# Altium PCB 尺寸.PcbDoc
Units mm, origin at the board's own origin, x right, y up, seen from the top; angles counter-clockwise.
Board outline 190 x 34 mm, 2 copper layers (Top Layer, Bottom Layer); 17 components, 0 nets, 39 pads, 0 vias.
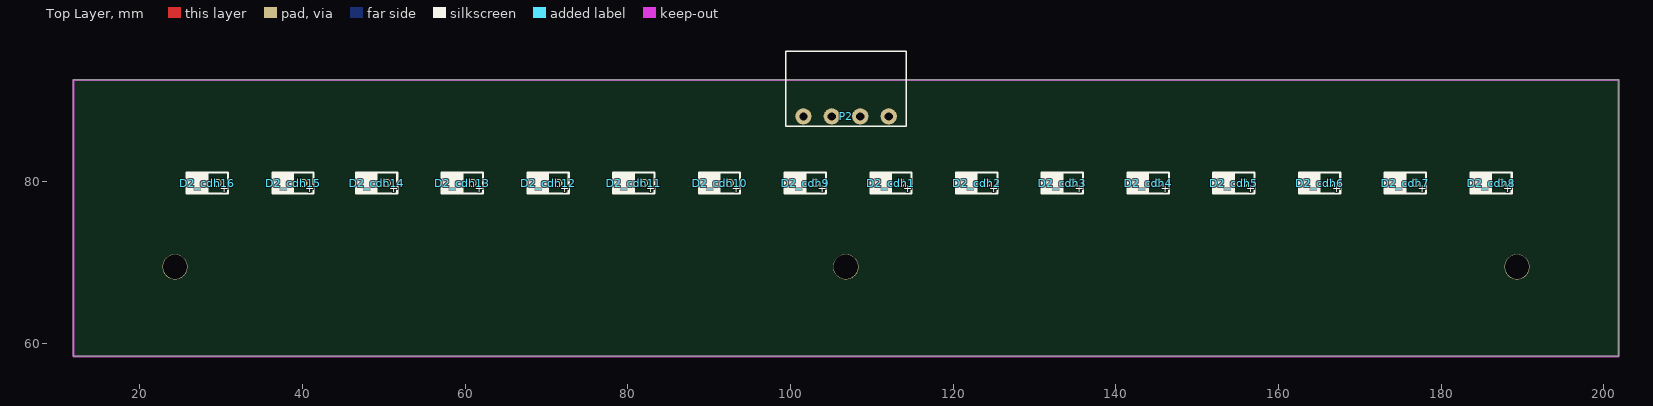
[diagram p0: Top Layer view]
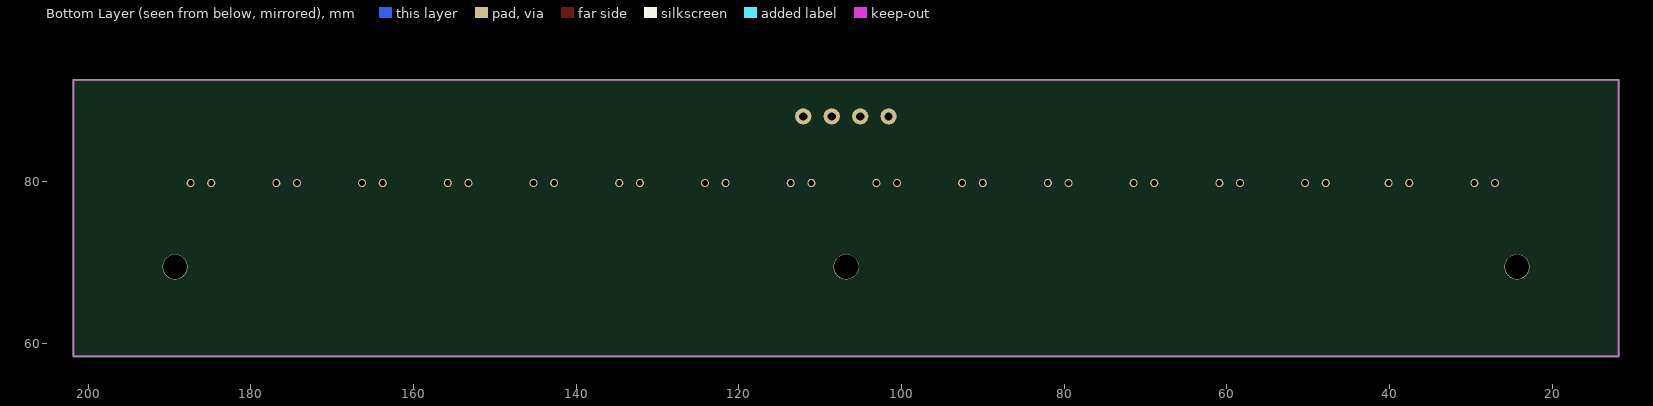
[diagram p1: Bottom Layer view, seen from below]

## Layer stack, top to bottom
Top Layer: signal copper 0.0356
Dielectric: dielectric 0.32, FR-4, Dk 4.8
Bottom Layer: signal copper 0.0356

## Board outline
11.822,58.471 11.822,92.471 201.822,92.471 201.822,58.471

## Design rules (kind name [scope] priority, off if disabled: settings)
Clearance [All] p1: gap=0.254
PolygonConnect [All] p1: connectstyle=Relief reliefconductorwidth=0.254 reliefentries=4 polygonreliefangle="90 Angle"
RoutingVias [All] p1: holewidth=0.711 width=1.27 viastyle="Through Hole" minholewidth=0.711 minwidth=1.27 maxholewidth=0.711 maxwidth=1.27
SilkscreenOverComponentPads [All] p1: minsilkscreentomaskgap=0.254
SolderMaskExpansion [All] p1: expansion=0.102
Width [All] p1: maxlimit=0.254 minlimit=0.254 preferedwidth=0.254
27 further rules are at their usual default settings.

## Components (designator, comment, footprint, x,y, rotation, side; value= is the part's Value field where it differs from the comment)
D2_cdh1 "LED0" LED1 111.081,79.781 r0 top (schematic designator D2)
D2_cdh2 "LED0" LED1 121.621,79.781 r0 top (schematic designator D2)
D2_cdh3 "LED0" LED1 132.161,79.781 r0 top (schematic designator D2)
D2_cdh4 "LED0" LED1 142.701,79.781 r0 top (schematic designator D2)
D2_cdh5 "LED0" LED1 153.241,79.781 r0 top (schematic designator D2)
D2_cdh6 "LED0" LED1 163.781,79.781 r0 top (schematic designator D2)
D2_cdh7 "LED0" LED1 174.321,79.781 r0 top (schematic designator D2)
D2_cdh8 "LED0" LED1 184.861,79.781 r0 top (schematic designator D2)
D2_cdh9 "LED0" LED1 100.541,79.781 r0 top (schematic designator D2)
D2_cdh10 "LED0" LED1 90.001,79.781 r0 top (schematic designator D2)
D2_cdh11 "LED0" LED1 79.461,79.781 r0 top (schematic designator D2)
D2_cdh12 "LED0" LED1 68.921,79.781 r0 top (schematic designator D2)
D2_cdh13 "LED0" LED1 58.381,79.781 r0 top (schematic designator D2)
D2_cdh14 "LED0" LED1 47.841,79.781 r0 top (schematic designator D2)
D2_cdh15 "LED0" LED1 37.568,79.781 r0 top (schematic designator D2)
D2_cdh16 "LED0" LED1 27.028,79.781 r0 top (schematic designator D2)
P2 "Header 4" DZ-4-3.5 112.075,87.975 r180 top

## Footprints (in the part's own frame and the unit in brackets; to place one, negate y for a bottom-side part, rotate by r counter-clockwise, add the part's x,y. Pads: shape width x height; smd on the part's side, far side on the other; paste and mask are expansions set on the pad)
DZ-4-3.5 [mm]
  round 2 hole 1: 1(0,0) 2(3.5,0) 3(7,0) 4(10.5,0)
  silkscreen extent -2.15,-8 12.65,1.2
LED1 [mm]
  round 1 hole 0.7: 1(2.54,0) 2(0,0)
  silkscreen extent -1.27,-1.27 3.81,1.27

## Part data
D2_cdh1 D2_cdh2 D2_cdh3 D2_cdh4 D2_cdh5 D2_cdh6 D2_cdh7 D2_cdh8 D2_cdh9 D2_cdh10 D2_cdh11 D2_cdh12 D2_cdh13 D2_cdh14 D2_cdh15 D2_cdh16: "Typical INFRARE"

## Free pads (board coordinates)
  round 3.1 hole 3: 3(24.318,69.471) 3(106.807,69.469) 3(189.318,69.471)

## Nets (pads, with @x,y where several pads share a name; then routed paths per layer and width w, separated by ;. In a path a pad name is that pad's centre, name@x,y a point inside that pad or via, vN(x,y) a via of type N, cw(c..) or ccw(c..) an arc to the next point about the centre after c; other vN are vias at no path point)
pads on no net: D2_cdh1.1 D2_cdh1.2 D2_cdh2.1 D2_cdh2.2 D2_cdh3.1 D2_cdh3.2 D2_cdh4.1 D2_cdh4.2 D2_cdh5.1 D2_cdh5.2 D2_cdh6.1 D2_cdh6.2 D2_cdh7.1 D2_cdh7.2 D2_cdh8.1 D2_cdh8.2 D2_cdh9.1 D2_cdh9.2 D2_cdh10.1 D2_cdh10.2 D2_cdh11.1 D2_cdh11.2 D2_cdh12.1 D2_cdh12.2 D2_cdh13.1 D2_cdh13.2 D2_cdh14.1 D2_cdh14.2 D2_cdh15.1 D2_cdh15.2 D2_cdh16.1 D2_cdh16.2 P2.1 P2.2 P2.3 P2.4

## Keep-outs
Keep-Out Layer:
  lines w0.254: 11.822,58.471 11.822,92.471 201.822,92.471 201.822,58.471 11.836,58.471

## Text inside footprints (layer, text, board x,y; h text height)
D2_cdh1: Top Overlay "+" at 113.875,78.638 h1
D2_cdh2: Top Overlay "+" at 124.415,78.638 h1
D2_cdh3: Top Overlay "+" at 134.955,78.638 h1
D2_cdh4: Top Overlay "+" at 145.495,78.638 h1
D2_cdh5: Top Overlay "+" at 156.035,78.638 h1
D2_cdh6: Top Overlay "+" at 166.575,78.638 h1
D2_cdh7: Top Overlay "+" at 177.115,78.638 h1
D2_cdh8: Top Overlay "+" at 187.655,78.638 h1
D2_cdh9: Top Overlay "+" at 103.335,78.638 h1
D2_cdh10: Top Overlay "+" at 92.795,78.638 h1
D2_cdh11: Top Overlay "+" at 82.255,78.638 h1
D2_cdh12: Top Overlay "+" at 71.715,78.638 h1
D2_cdh13: Top Overlay "+" at 61.175,78.638 h1
D2_cdh14: Top Overlay "+" at 50.635,78.638 h1
D2_cdh15: Top Overlay "+" at 40.362,78.638 h1
D2_cdh16: Top Overlay "+" at 29.822,78.638 h1